# Altium PCB POVBase.PcbDoc (part 2 of 3)
Units mm, origin at the board's own origin, x right, y up, seen from the top; angles counter-clockwise.
Board outline 80 x 80 mm, 2 copper layers (Top Layer, Bottom Layer); 110 components, 82 nets, 474 pads, 224 vias.
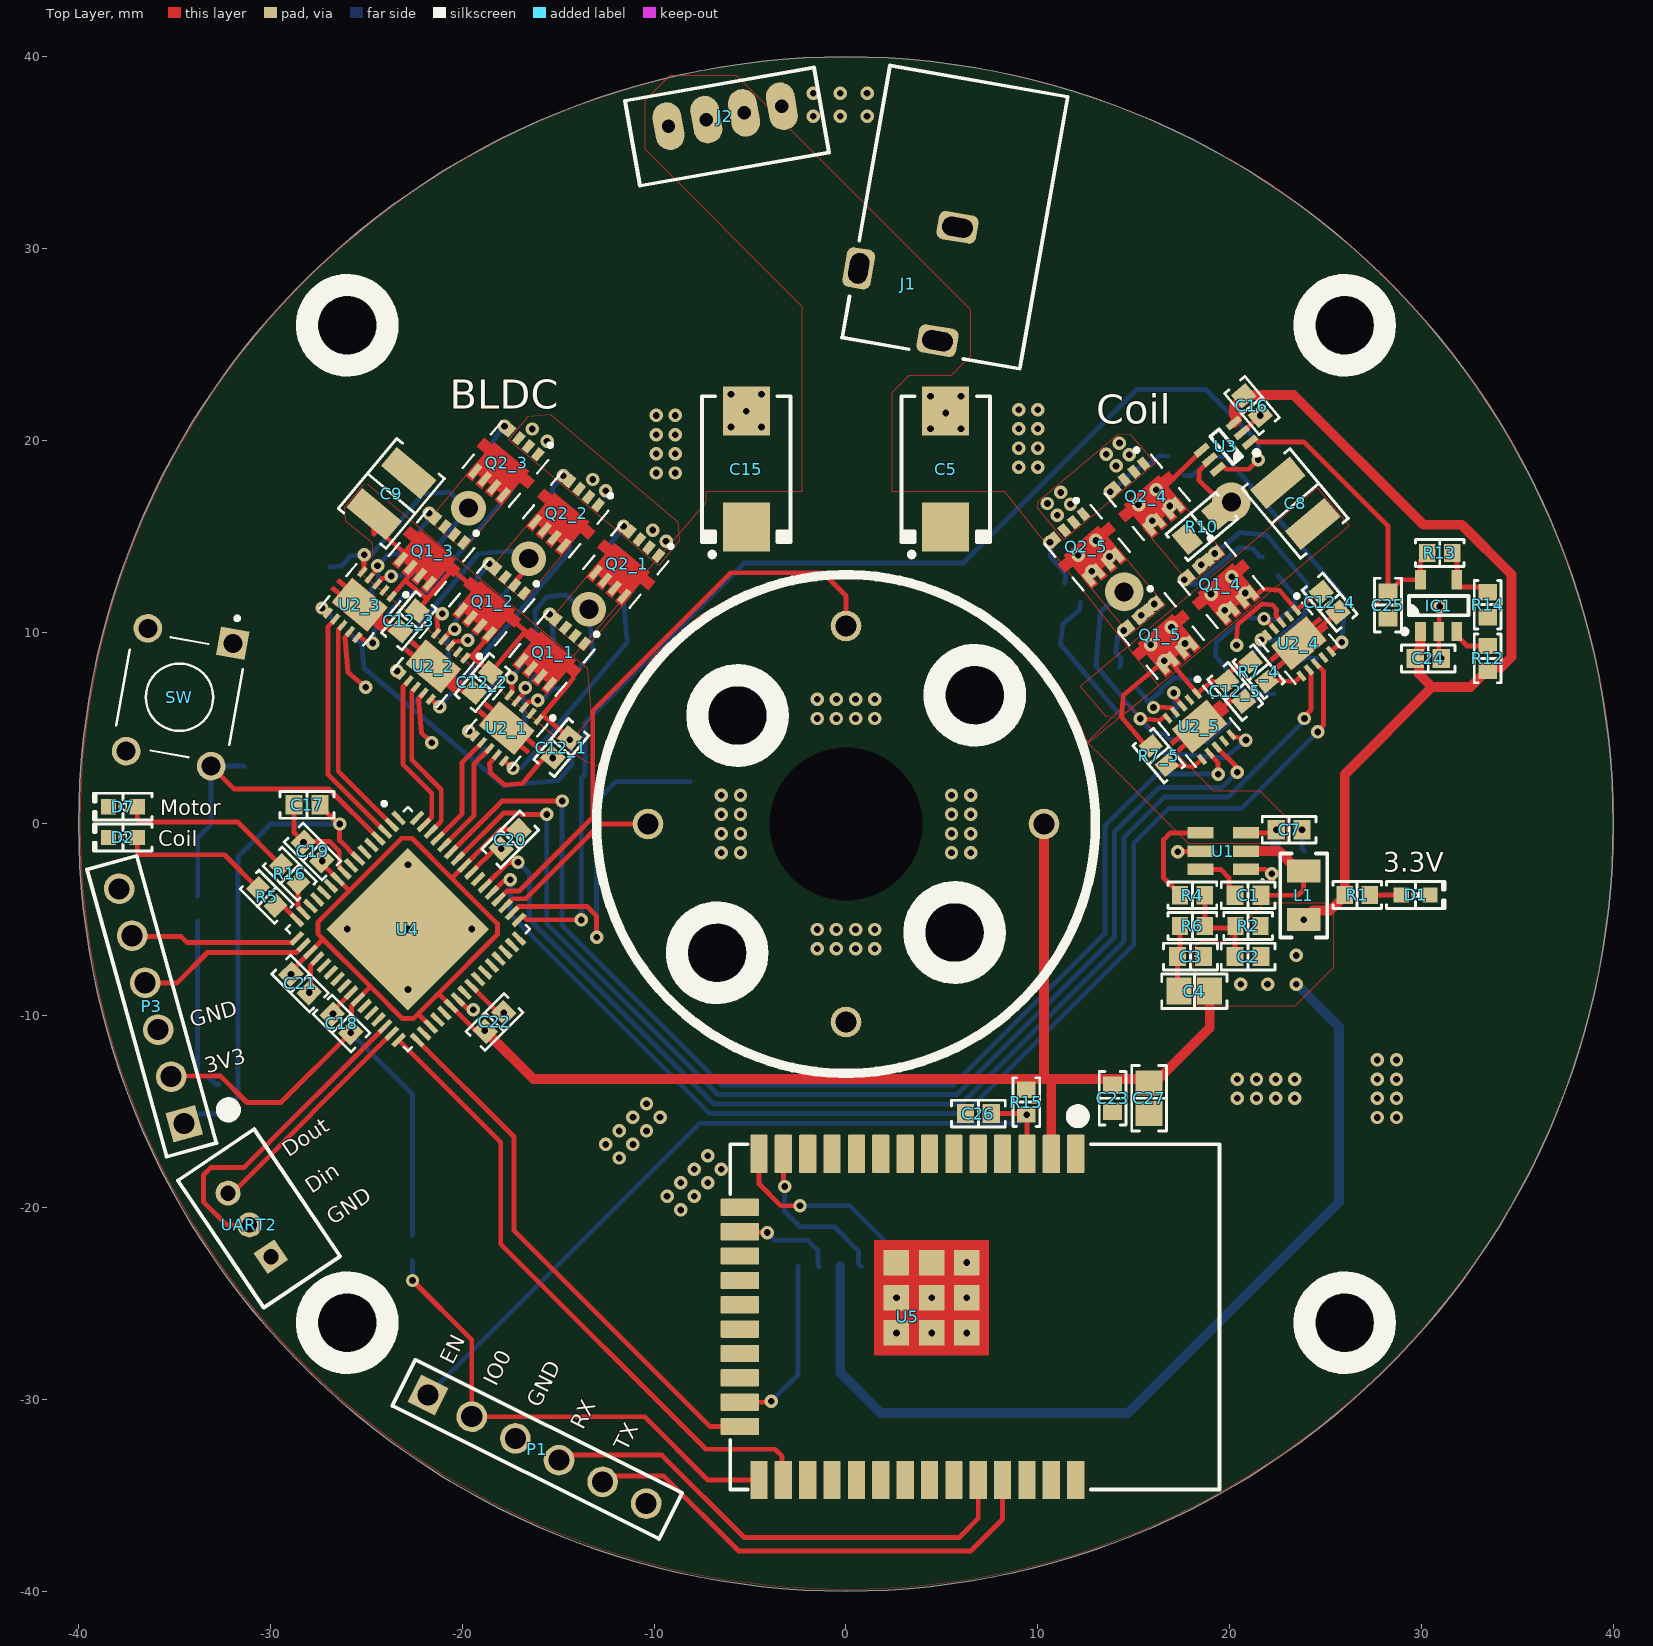
[diagram p0: Top Layer view]

## Via types
v1: diameter 0.7, hole 0.35, Top Layer to Bottom Layer, tented both sides, 219 vias
v2: diameter 1.8, hole 1, Top Layer to Bottom Layer, tented top, 3 vias
v3: diameter 2, hole 1, Top Layer to Bottom Layer, tented top, 2 vias

## Nets (pads, with @x,y where several pads share a name; then routed paths per layer and width w, separated by ;. In a path a pad name is that pad's centre, name@x,y a point inside that pad or via, vN(x,y) a via of type N, cw(c..) or ccw(c..) an arc to the next point about the centre after c; other vN are vias at no path point) (continued)
3V3: (continued)
  Top Layer w0.254: P3.2@-35.182,-13.171 -35.154,-13.144 -32.604,-13.144 -31.227,-14.52 -29.466,-14.52 v1(-25.823,-10.877) -25.787,-10.842 -25.787,-9.49 -25.445,-9.148 U4.26@-25.445,-9.144 -24.82,-8.518 -24.749,-8.518 ; v1(-28.935,-7.836) -28.935,-7.684 U4.19@-27.92,-6.669 -27.295,-6.043 -27.295,-5.972 ; C19.1@-27.378,-1.932 -27.378,-2 U4.10@-26.506,-2.872 -25.932,-3.445 -25.932,-3.516 ; v1(-27.309,-1.932) C19.1@-27.332,-1.909 C19.1@-27.299,-1.876 ; U4.35@-21.648,-10.558 -22.274,-9.932 -22.274,-9.861 ; C22.1@-18.799,-10.797 v1(-18.834,-10.762) -19.323,-10.762 U4.38@-20.588,-9.497 -21.213,-8.872 -21.213,-8.801 ; C20.1@-17.025,-0.331 -17.06,-0.296 -18.018,-0.296 -18.878,-1.156 -18.878,-1.162 U4.57@-19.881,-2.165 -20.522,-2.807 -20.522,-2.845 ; C4.2@18.961,-8.765 C4.2@18.961,-8.715 ; -27.295,-5.972 -24.749,-8.518 ; -27.295,-5.972 -27.537,-5.73 -27.537,-5.121 -25.932,-3.516 ; -25.932,-3.516 -23.156,-0.74 -22.628,-0.74 -20.522,-2.845 ; -24.749,-8.518 -23.123,-10.144 -22.557,-10.144 -22.274,-9.861 ; -22.274,-9.861 -21.213,-8.801 ; -21.213,-8.801 -18.173,-5.76 -18.173,-5.195 -20.522,-2.845
  Top Layer w0.512: v1(-18.834,-10.762) -16.296,-13.3 10.324,-13.3 ; C20.1@-17.025,-0.331 -16.905,-0.211 C20.1@-16.905,-0.177 ; P8.1@10.324,0 10.324,-13.3 ; U5.2@10.705,-17.2 10.705,-13.3 ; C4.2@18.961,-8.765 18.961,-10.639 16.3,-13.3 10.705,-13.3 ; U3.3@20.225,20.905 20.38,21.06 20.38,21.179 20.225,21.334 20.225,21.753 C16.1@20.732,22.261 ; C16.1@20.732,22.334 C16.1@20.732,22.261 ; v1(23.861,-4.99) 24.334,-4.517 25.233,-4.517 26,-3.75 R1.1@26,-3.7 26,2.582 30.553,7.134 ; C24.1@29.678,8.634 C24.1@29.815,8.772 ; IC1.1@29.953,10.034 29.953,9.178 29.872,9.097 29.872,8.828 C24.1@29.815,8.772 ; R12.2@33.403,7.984 32.553,7.134 30.553,7.134 ; R12.2@33.453,7.984 33.622,8.153 34.153,8.153 34.7,8.7 34.7,13 32.1,15.6 30.1,15.6 23.334,22.366 20.838,22.366 C16.1@20.732,22.261 ; 10.324,-13.3 10.705,-13.3 ; C24.1@29.815,8.772 29.871,8.716 29.871,7.816 30.553,7.134
  Bottom Layer w0.254: P3.2@-35.182,-13.171 -35.154,-13.144 -33.8,-13.144 ; R11.2@-33.8,-5.05 -33.8,-13.144 ; R20.2@-32.69,-13.578 -32.855,-13.578 -33.29,-13.144 -33.8,-13.144 ; v1(-25.823,-10.877) -22.6,-14.1 R17.1@-22.6,-21.45
  Bottom Layer w0.512: J4.4@-0.3,-23.075 -0.3,-28.6 1.8,-30.7 14.7,-30.7 25.7,-19.7 25.7,-10.571 v1(23.48,-8.35)
  other v1: 20.58,-8.35 21.98,-8.35 23.48,-6.85
A: P6.1 U4.51 | length 9.2
  Top Layer w0.254: U4.51@-17.759,-4.286 -17.373,-3.9 -16.7,-3.9 -14.1,-1.3 -12.8,0 P6.1@-10.324,0
B: P5.1 U4.52 | length 30.5
  Top Layer w0.254: U4.52@-18.113,-3.932 -17.68,-3.5 -17.049,-3.5 -14.149,-0.6 -13.2,0.349 -13.2,5.9 -6,13.1 -1.2,13.1 0,11.9 P5.1@0,10.324
BLDC_HI1: U2_1.7 U4.61 | length 6
  Top Layer w0.254: U4.61@-21.295,-0.75 -20.027,0.518 -20.027,3.197 U2_1.7@-18.97,4.253
BLDC_HI2: U2_2.7 U4.63 | length 8.4
  Top Layer w0.254: U2_2.7@-22.798,7.468 -23.1,7.165 -23.1,3.112 -21.6,1.612 -21.6,0.363 -22.002,-0.039 U4.63@-22.002,-0.043
BLDC_HI3: U2_3.7 U4.3 | length 12.5
  Top Layer w0.254: U2_3.7@-26.631,10.681 -27,10.312 -27,2.572 U4.3@-24.031,-0.397
BLDC_LOW1: U2_1.8 U4.60 | length 6
  Top Layer w0.254: U4.60@-20.941,-1.104 -19.4,0.437 -19.4,3.119 U2_1.8@-18.587,3.932